# Altium PCB PCB1.PcbDoc
Units mm, origin at the board's own origin, x right, y up, seen from the top; angles counter-clockwise.
Board outline 85 x 46 mm, 2 copper layers (Top Layer, Bottom Layer); 27 components, 16 nets, 67 pads, 0 vias.
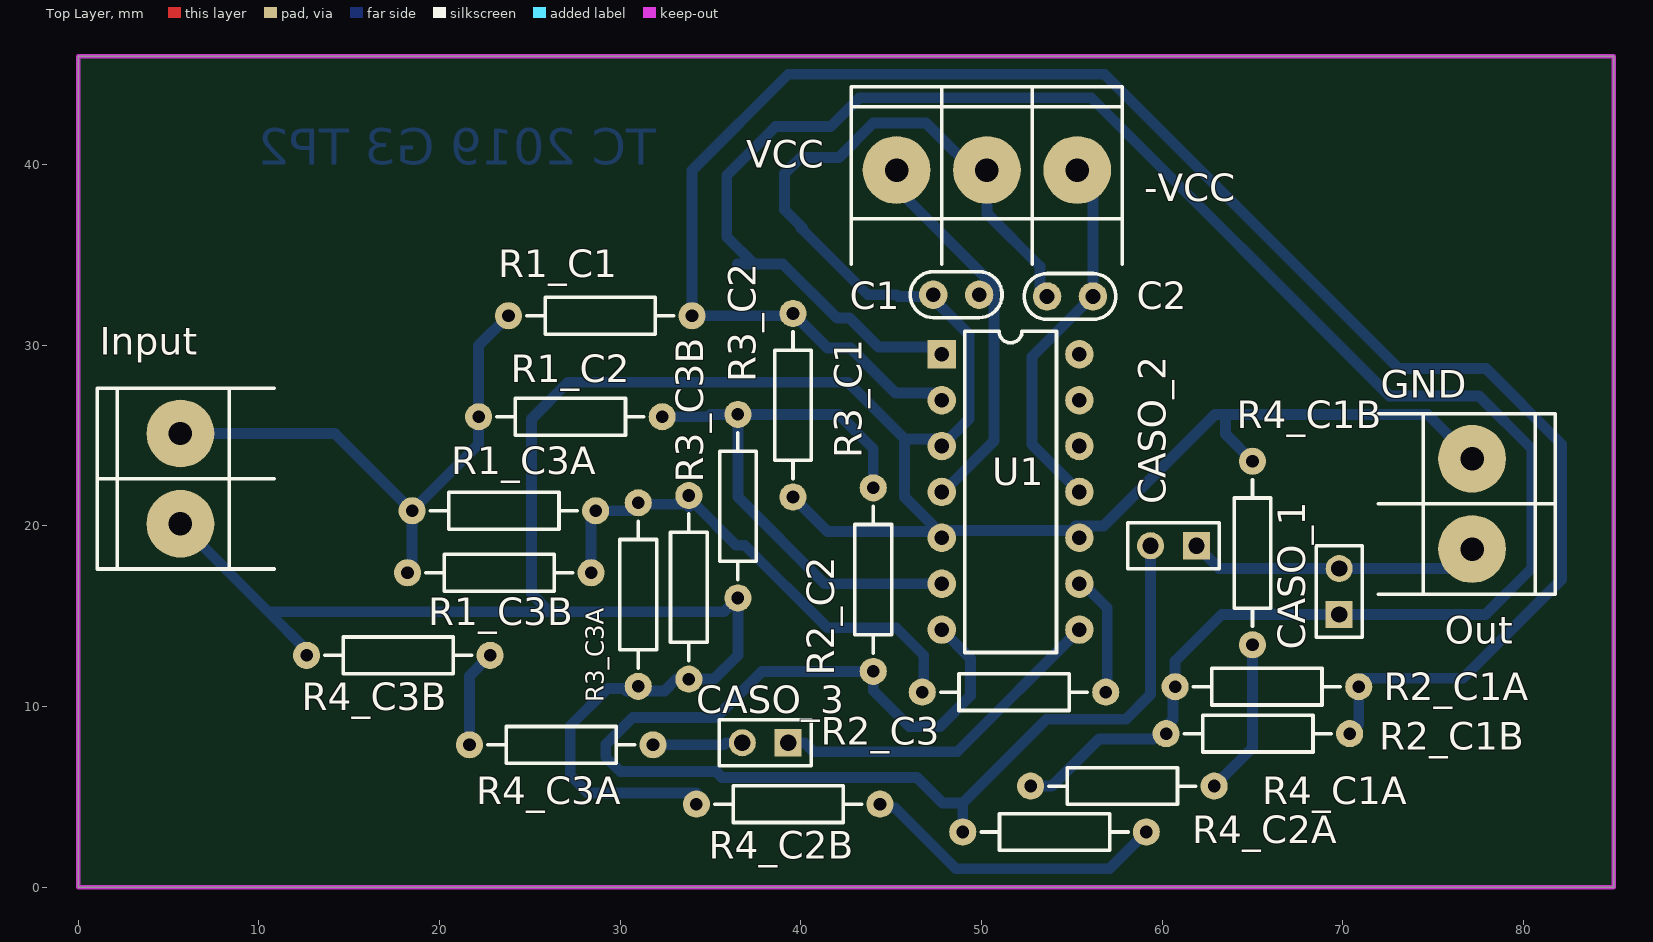
[diagram p0: Top Layer view]
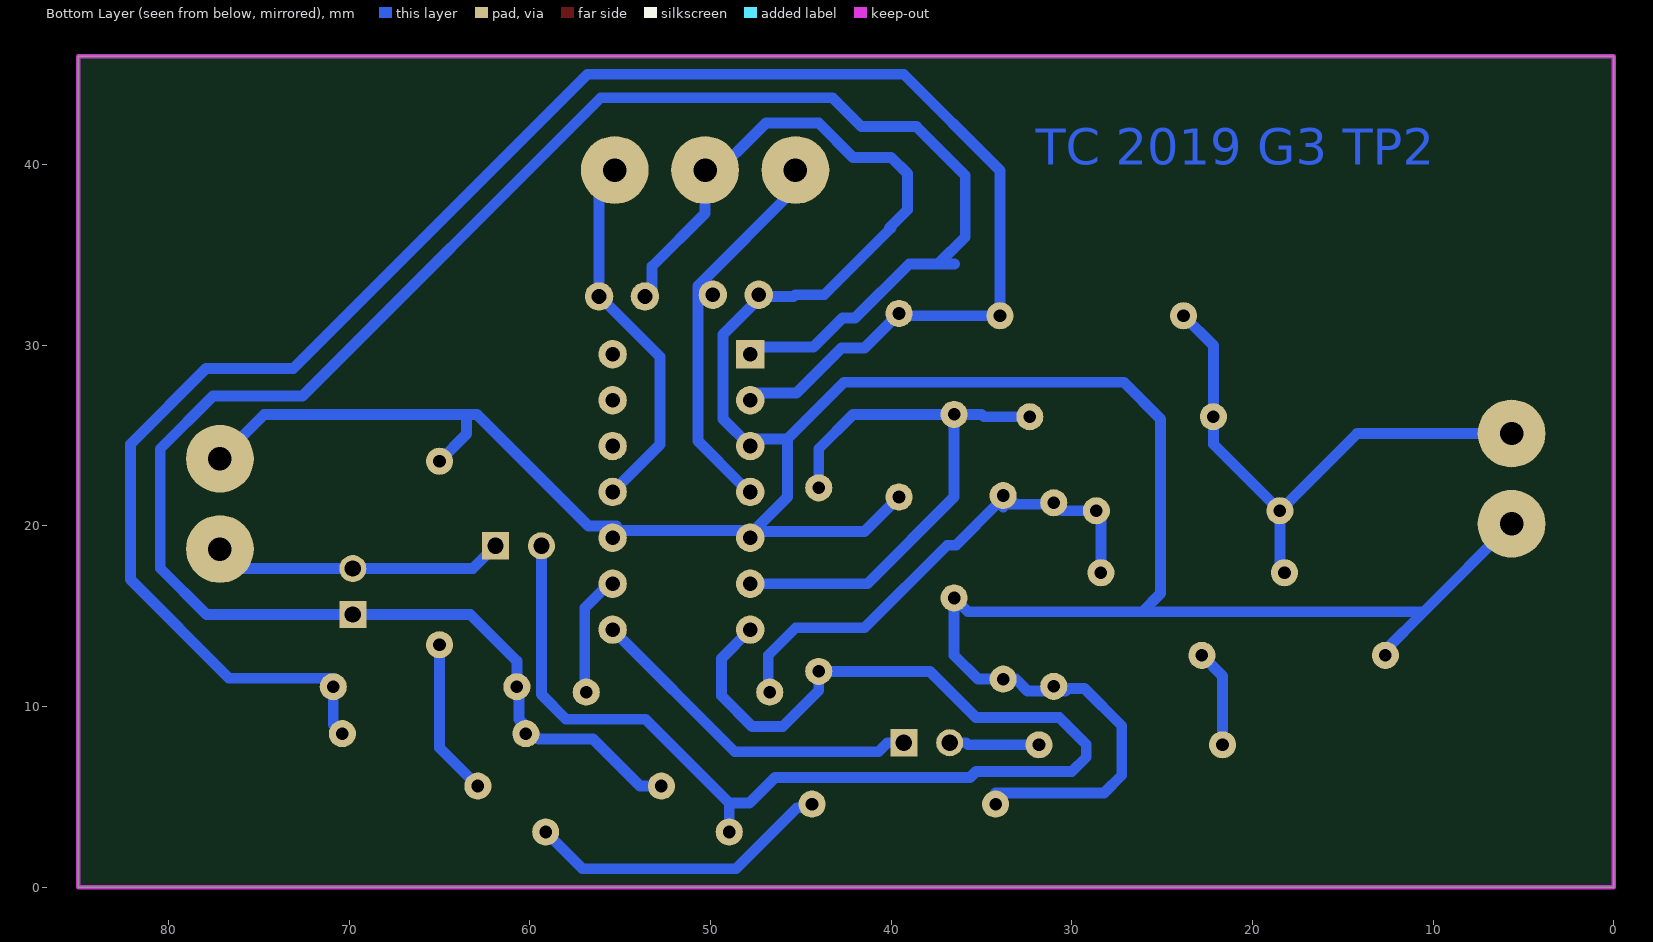
[diagram p1: Bottom Layer view, seen from below]

## Layer stack, top to bottom
Top Solder: solder mask 0.0102, Solder Resist, Dk 3.5
Top Layer: signal copper 0.0356
Dielectric 1: dielectric 0.32, FR-4, Dk 4.8
Bottom Layer: signal copper 0.0356
Bottom Solder: solder mask 0.0102, Solder Resist, Dk 3.5

## Board outline
0,0 0,46 85,46 85,0

## Design rules (kind name [scope] priority, off if disabled: settings)
Clearance [All] p1: gap=0.254
PolygonConnect [All] p1: connectstyle=Relief reliefconductorwidth=0.254 reliefentries=4 polygonreliefangle="90 Angle" airgapwidth=0.254
RoutingVias [All] p1: holewidth=0.711 width=1.27 viastyle="Through Hole" minholewidth=0.711 minwidth=1.27 maxholewidth=0.711 maxwidth=1.27
SolderMaskExpansion [All] p1: expansion=0.102
Width [All] p1: maxlimit=0.6 minlimit=0.6 preferedwidth=0.6
30 further rules are at their usual default settings.

## Components (designator, comment, footprint, x,y, rotation, side; value= is the part's Value field where it differs from the comment)
C1 "100n" CAP100 48.6,32.8 r0 top
C2 "100n" CAP100 54.9,32.7 r180 top
CASO_1 "Header 2" HDR1X2 69.8,15.1 r90 top
CASO_2 "Header 2" HDR1X2 61.9,18.9 r180 top
CASO_3 "Header 2" HDR1X2 39.3,8 r180 top
GND "BORNERA 2" BORNERA2 77.157,21.219 r180 top (schematic designator Output)
Input "BORNERA 2" BORNERA2 5.656,22.616 r0 top
R1_C1 "Res2" AXIAL-0.4 28.897,31.633 r0 top
R1_C2 "Res2" AXIAL-0.4 27.246,26.045 r0 top
R1_C3A "Res2" AXIAL-0.4 23.563,20.838 r0 top
R1_C3B "Res2" AXIAL-0.4 23.309,17.409 r0 top
R2_C1A "Res2" AXIAL-0.4 65.8,11.1 r0 top
R2_C1B "Res2" AXIAL-0.4 65.3,8.5 r0 top
R2_C2 "Res2" AXIAL-0.4 44.01,17.028 r90 top
R2_C3 "Res2" AXIAL-0.4 51.8,10.8 r180 top
R3_C1 "Res2" AXIAL-0.4 39.565,26.68 r90 top
R3_C2 "Res2" AXIAL-0.4 36.517,21.092 r90 top
R3_C3A "Res2" AXIAL-0.4 31,16.2 r90 top
R3_C3B "Res2" AXIAL-0.4 33.8,16.6 r90 top
R4_C1A "Res2" AXIAL-0.4 57.8,5.6 r0 top
R4_C1B "Res2" AXIAL-0.4 65,18.5 r270 top
R4_C2A "Res2" AXIAL-0.4 54.043,3.058 r180 top
R4_C2B "Res2" AXIAL-0.4 39.3,4.6 r0 top
R4_C3A "Res2" AXIAL-0.4 26.738,7.884 r180 top
R4_C3B "Res2" AXIAL-0.4 17.721,12.837 r0 top
U1 "LM324N" DIP14 47.8,29.5 r0 top
VCC "BORNERA 3" BORNERA3 50.3,39.7 r270 top

## Footprints (in the part's own frame and the unit in brackets; to place one, negate y for a bottom-side part, rotate by r counter-clockwise, add the part's x,y. Pads: shape width x height; smd on the part's side, far side on the other; paste and mask are expansions set on the pad)
AXIAL-0.4 [mm] "Axial Device, Thru-Hole; 2 Leads; 0.4 in Pin Spacing"
  round 1.5 hole 0.7: 1(-5.08,0) 2(5.08,0)
  silkscreen extent -4.06,-1.02 4.06,1.02
BORNERA2 [mm] "Bornera con Tornillos 5mm separación"
  round 3.75 hole 1.3: 1(0,2.5) 2(0,-2.5)
  silkscreen extent -4.6,-5 5.2,5, body extent -3.76,-4.89 3.94,5.61, height 10
BORNERA3 [mm] "Bornera con Tornillos 5mm separación"
  round 3.75 hole 1.3: 1(0,5) 2(0,0) 3(0,-5)
  silkscreen extent -4.6,-7.5 5.2,7.5, body extent -3.76,-7.39 3.94,8.11, height 10.05
CAP100 [mil]
  round 62 hole 32: 1(-50,0) 2(50,0)
  silkscreen extent -100,-50 100,50, body extent -115,-33 115,34, height 241
DIP14 [mil]
  rect 62x62 hole 32: 1(0,0)
  round 62 hole 32: 2(0,-100) 3(0,-200) 4(0,-300) 5(0,-400) 6(0,-500) 7(0,-600) 8(300,-600) 9(300,-500) 10(300,-400) 11(300,-300) 12(300,-200) 13(300,-100) 14(300,0)
  silkscreen extent 50,-650 250,50, body extent -5,-675 305,75, height 165
HDR1X2 [mm] "Connector; Header; 2 Position"
  rect 1.5x1.5 hole 0.9: 1(0,0)
  round 1.5 hole 0.9: 2(2.54,0)
  silkscreen extent -1.27,-1.27 3.81,1.27

## Part data
C1 C2: library part CAP
CASO_1 CASO_2 CASO_3: "Header, 2-Pin"
R1_C1 R1_C2 R1_C3A R1_C3B R2_C1A R2_C1B R2_C2 R2_C3 R3_C1 R3_C2 R3_C3A R3_C3B R4_C1A R4_C1B R4_C2A R4_C2B R4_C3A R4_C3B: "Resistor"
U1: "Low Power Quad Operational Amplifier, 14-pin MDIP"

## Nets (pads, with @x,y where several pads share a name; then routed paths per layer and width w, separated by ;. In a path a pad name is that pad's centre, name@x,y a point inside that pad or via, vN(x,y) a via of type N, cw(c..) or ccw(c..) an arc to the next point about the centre after c; other vN are vias at no path point)
-VCC: C2.1 U1.11 VCC.1 | length 20.6
  Bottom Layer w0.6: VCC.1 56.17,38.83 C2.1 ; U1.11 52.8,24.5 52.8,29.367 C2.1@56.116,32.683
GND: C1.1 C2.2 GND.2 Input.2 R3_C1.1 R3_C2.1 R3_C3A.1 R3_C3B.1 R4_C1B.1 R4_C2B.1 R4_C3B.1 U1.3 U1.5 U1.10 VCC.2 | length 191.9
  Bottom Layer w0.6: Input.2 10.522,15.25 ; R4_C3B.1 12.641,13.131 10.522,15.25 ; R4_C2B.1@34.231,5.217 28.217,5.217 27.234,6.2 27.234,8.934 29.3,11 30.226,11 30.358,10.868 32.453,10.868 33.105,11.52 35.2,11.52 36.517,12.837 R3_C2.1 35.755,15.25 26.103,15.25 ; R3_C1.1 41.47,19.695 47.555,19.695 U1.5@47.6,19.74 ; U1.3@47.6,24.82 45.743,24.82 ; U1.3 49.3,25.92 49.3,30.6 47.43,32.47 47.43,32.7 45.4,32.7 45.3,32.8 43.7,32.8 40,36.5 40.1,36.5 39.1,37.5 39.1,39.5 40,40.4 42.109,40.4 44.009,42.3 46.932,42.3 50.233,38.999 VCC.2@50.233,38.745 ; VCC.2 50.3,37.3 53.23,34.37 C2.2@53.23,32.7 ; U1.10@55.2,20 56.761,20 62.933,26.172 63.5,26.172 ; U1.10@55.22,19.74 U1.5@47.6,19.74 ; R4_C1B.1 63.5,25.08 63.5,26.172 ; GND.2 74.704,26.172 63.5,26.172 ; 10.522,15.25 26.103,15.25 ; 26.103,15.25 25.087,16.266 25.087,25.918 27.119,27.95 42.613,27.95 45.743,24.82 ; 45.743,24.82 45.743,21.597 U1.5@47.6,19.74
NetCASO_1_1: CASO_1.1 R2_C1A.1 R2_C1B.1 R4_C1A.1 U1.1 | length 114.5
  Bottom Layer w0.6: 36.5,34.5 39,34.5 41.994,31.506 42.694,31.506 44.3,29.9 U1.1@47.6,29.9 ; 37.4,34.5 35.9,36 35.9,39.4 38.6,42.1 41.65,42.1 43.25,43.7 56.073,43.7 72.585,27.188 77.538,27.188 80.459,24.267 80.459,17.659 77.9,15.1 CASO_1.1 63.3,15.1 60.72,12.52 R2_C1A.1 ; R4_C1A.1 53.9,5.6 56.5,8.2 59.52,8.2 60.6,9.28 R2_C1A.1@60.6,11.567
NetCASO_1_2: CASO_1.2 CASO_2.1 GND.1 | length 16.2
  Bottom Layer w0.6: CASO_2.1 63.16,17.64 CASO_1.2 76.078,17.64 GND.1
NetCASO_2_2: CASO_2.2 R2_C2.1 R4_C2A.2 U1.7 | length 73
  Bottom Layer w0.6: U1.7 49.4,12.66 49.4,10.6 47.7,8.9 46,8.9 44.01,10.89 R2_C2.1 37.848,11.948 35.3,9.4 30.7,9.4 29.2,7.9 29.2,7.2 30,6.4 35.3,6.4 35.629,6.071 46.429,6.071 47.837,4.663 48.963,4.663 ; R4_C2A.2 48.963,4.663 ; CASO_2.2 59.36,10.66 58,9.3 53.6,9.3 48.963,4.663
NetCASO_3_1: CASO_3.1 U1.8 | length 19.1
  Bottom Layer w0.6: CASO_3.1 40.2,8 40.7,7.5 48.66,7.5 U1.8
NetCASO_3_2: CASO_3.2 R4_C3A.1 | length 5
  Bottom Layer w0.6: R4_C3A.1 35.744,7.884 35.86,8 CASO_3.2
NetInput_1: Input.1 R1_C1.1 R1_C2.1 R1_C3A.1 R1_C3B.1 | length 31.1
  Bottom Layer w0.6: Input.1 14.205,25.116 R1_C3A.1 ; R1_C3B.1 18.483,17.663 R1_C3A.1 ; R1_C1.1 22.166,29.982 R1_C2.1 22.166,24.521 R1_C3A.1
NetR1_C1_2: R1_C1.2 R2_C1A.2 R2_C1B.2 R3_C1.2 U1.2 | length 106.1
  Bottom Layer w0.6: U1.2@47.6,27.36 45.24,27.36 42.745,29.855 41.47,29.855 R3_C1.2 39.438,31.633 R1_C1.2 33.977,39.677 39.3,45 56.805,45 73.093,28.712 77.919,28.712 82.11,24.521 82.11,17.028 76.649,11.567 R2_C1A.2@70.9,11.567 ; R2_C1B.2 70.88,9 R2_C1A.2
NetR1_C2_2: R1_C2.2 R2_C2.2 R3_C2.2 U1.6 | length 32.5
  Bottom Layer w0.6: R1_C2.2 34.866,26.045 34.993,26.172 R3_C2.2 ; R2_C2.2 44.01,24.267 42.105,26.172 R3_C2.2 ; U1.6 41.317,16.8 36.517,21.6 R3_C2.2
NetR1_C3A_2: R1_C3A.2 R1_C3B.2 R2_C3.2 R3_C3A.2 R3_C3B.2 | length 28.5
  Bottom Layer w0.6: R1_C3B.2 28.389,20.584 R1_C3A.2 30.548,20.838 30.91,21.2 33.655,21.2 33.8,21.055 R3_C3B.2 ; 33.075,21.225 34.125,21.225 36.417,18.933 36.898,18.933 41.47,14.361 45.28,14.361 46.804,12.837 R2_C3.2@46.804,11.059
NetR2_C3_1: R2_C3.1 U1.9 | length 6.9
  Bottom Layer w0.6: U1.9@55.22,17.2 56.964,15.456 R2_C3.1@56.964,11.059
NetR4_C1A_2: R4_C1A.2 R4_C1B.2 | length 8.7
  Bottom Layer w0.6: R4_C1A.2 65,7.72 R4_C1B.2
NetR4_C2A_1: R4_C2A.1 R4_C2B.2 | length 17.2
  Bottom Layer w0.6: R4_C2B.2@44.2,4.4 45.208,4.4 48.582,1.026 57.091,1.026 R4_C2A.1
NetR4_C3A_2: R4_C3A.2 R4_C3B.2 | length 5.4
  Bottom Layer w0.6: R4_C3A.2 21.658,11.694 R4_C3B.2
VCC: C1.2 U1.4 VCC.3 | length 20.4
  Bottom Layer w0.6: VCC.3@45.233,38.745 50.7,33.278 50.7,24.7 48.28,22.28 U1.4@47.6,22.28
pads on no net: U1.12 U1.13 U1.14

## Keep-outs
Keep-Out Layer:
  the board outline again, w0.254

## Other copper
Bottom Layer:
  text "TC 2019 G3 TP2" at 32,40 h2

## Silkscreen, mask and mechanical layers (free items; w line width, h text height)
Top Overlay:
  text "-VCC" at 58.996,37.983 h1.52
  text "Out" at 75.633,13.472 h1.52